# EAGLE board Main board2 (EAGLE 5.07)
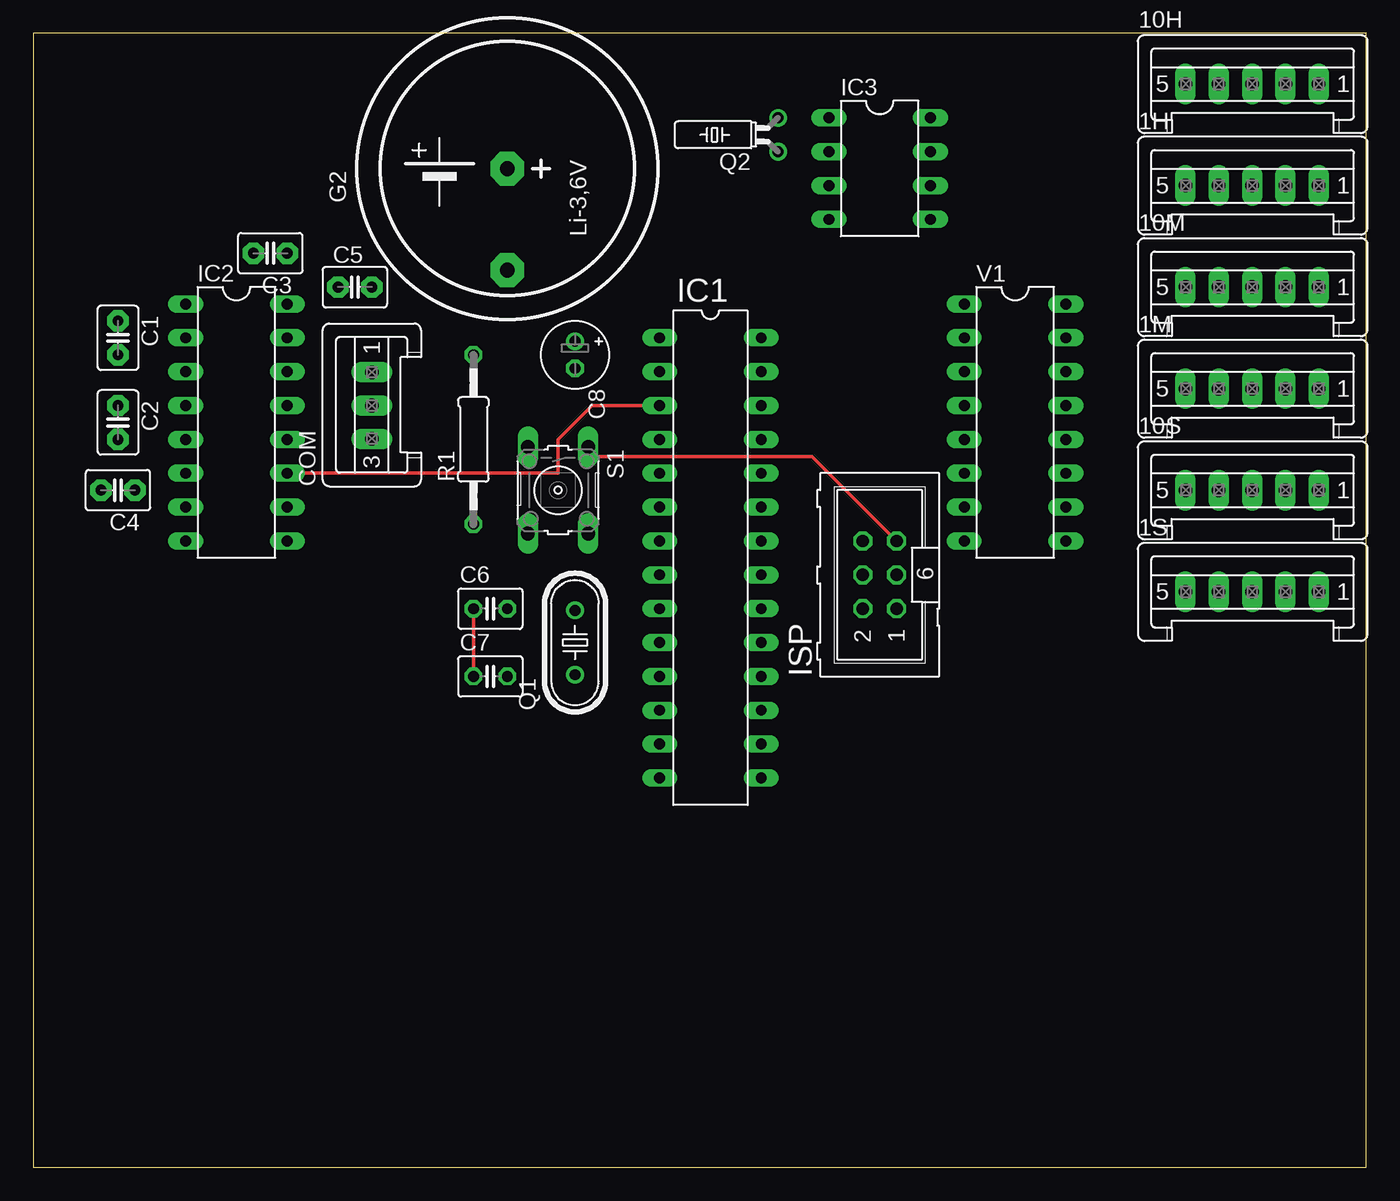
[diagram p0: board, top side]
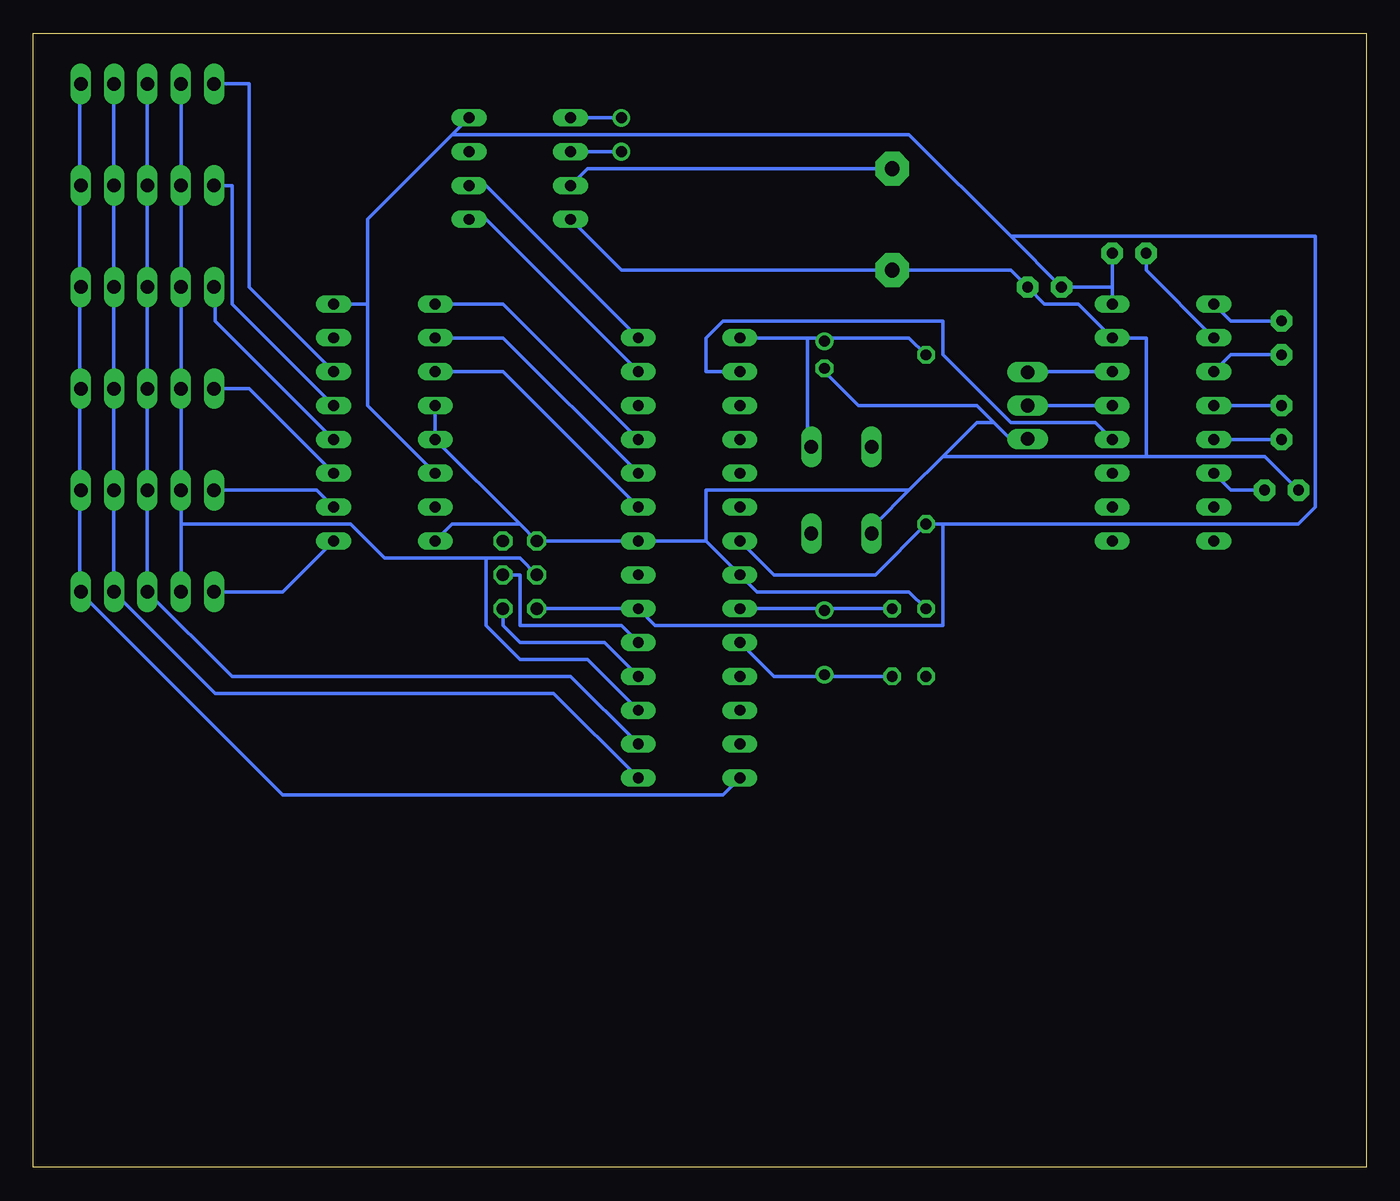
[diagram p1: board, bottom side, seen from below]

Size 100 x 85.08 mm. Coordinates in mm from the lower left corner, seen from the top.
Outline: 0,0 100,0 100,85.08 0,85.08 0,0
Copper layers (1*16): Top 0.035mm / dielectric 1.5mm / Bottom 0.035mm
Design rules "default": minimum track width 10mil, minimum drill 24mil, track to track 8mil, track to pad 8mil, pad to pad 8mil, via to via 8mil, smd to smd 8mil, copper to edge 40mil, drill to drill 8mil, minimum pad ring 10mil, minimum via ring 8mil, stop-mask expansion 4mil, vias tented up to drill 0mil, thermal gap 10mil

## Footprints (pad centres in the part's own frame; a part is rotated, then mirrored left to right if it is on the bottom)
S05P = drill 1.016 long: 1 5,0; 2 2.5,0; 3 0,0; 4 -2.5,0; 5 -5,0
C2.5-3 = drill 0.813 pad 1.6 octagon: 1 -1.27,0; 2 1.27,0
C025-030X050 = drill 0.813 octagon: 1 -1.27,0; 2 1.27,0
E2-5 = drill 0.813 pad 1.27 round: + -1.016,0 | drill 0.813 pad 1.27 octagon: - 1.016,0
S03P = drill 1.016 long: 1 2.5,0; 2 0,0; 3 -2.5,0
BEL/P = drill 1.118 pad 2.54 octagon: + 0,0; - -7.62,0
DIL28-3 = drill 0.813 long: 1 -16.51,-3.81; 2 -13.97,-3.81; 3 -11.43,-3.81; 4 -8.89,-3.81; 5 -6.35,-3.81; 6 -3.81,-3.81; 7 -1.27,-3.81; 8 1.27,-3.81; 9 3.81,-3.81; 10 6.35,-3.81; 11 8.89,-3.81; 12 11.43,-3.81; 13 13.97,-3.81; 14 16.51,-3.81; 15 16.51,3.81; 16 13.97,3.81; 17 11.43,3.81; 18 8.89,3.81; 19 6.35,3.81; 20 3.81,3.81; 21 1.27,3.81; 22 -1.27,3.81; 23 -3.81,3.81; 24 -6.35,3.81; 25 -8.89,3.81; 26 -11.43,3.81; 27 -13.97,3.81; 28 -16.51,3.81
DIL16 = drill 0.813 long: 1 -8.89,-3.81; 2 -6.35,-3.81; 3 -3.81,-3.81; 4 -1.27,-3.81; 5 1.27,-3.81; 6 3.81,-3.81; 7 6.35,-3.81; 8 8.89,-3.81; 9 8.89,3.81; 10 6.35,3.81; 11 3.81,3.81; 12 1.27,3.81; 13 -1.27,3.81; 14 -3.81,3.81; 15 -6.35,3.81; 16 -8.89,3.81
DIL8 = drill 0.813 long: 1 -8.89,-3.81; 2 -6.35,-3.81; 3 -3.81,-3.81; 4 -1.27,-3.81; 5 -1.27,3.81; 6 -3.81,3.81; 7 -6.35,3.81; 8 -8.89,3.81
ML6 = drill 0.914 octagon: 1 -2.54,-1.27; 2 -2.54,1.27; 3 0,-1.27; 4 0,1.27; 5 2.54,-1.27; 6 2.54,1.27
HC49U-V = drill 0.813 round: 1 -2.413,0; 2 2.413,0
TC26H = drill 0.813 round: 1 -1.27,0; 2 1.27,0
0207/12 = drill 0.813 octagon: 1 -6.35,0; 2 6.35,0
B3F-10XX = drill 1.016 long: 1 -3.251,2.261; 2 3.251,2.261; 3 -3.251,-2.261; 4 3.251,-2.261

## Placement (x,y rotation side)
1H  [S05P]  91.44,73.66 0 top
1M  [S05P]  91.44,58.42 0 top
1S  [S05P]  91.44,43.18 0 top
10H  [S05P]  91.44,81.28 0 top
10M  [S05P]  91.44,66.04 0 top
10S  [S05P]  91.44,50.8 0 top
C1  1 uF  [C2.5-3]  6.35,62.23 270 top
C2  1 uF  [C2.5-3]  6.35,55.88 270 top
C3  1 uF  [C2.5-3]  17.78,68.58 180 top
C4  1 uF  [C2.5-3]  6.35,50.8 180 top
C5  1 uF  [C2.5-3]  24.13,66.04 0 top
C6  20pF  [C025-030X050]  34.29,41.91 0 top
C7  20pF  [C025-030X050]  34.29,36.83 0 top
C8  0.1uF  [E2-5]  40.64,60.96 270 top
COM  1  [S03P]  25.4,57.15 90 top
G2  3V  [BEL/P]  35.56,74.93 90 top
IC1  MEGA8-P  [DIL28-3]  50.8,45.72 270 top
IC2  MAX232  [DIL16]  15.24,55.88 270 top
IC3  DS1307DIL8  [DIL8]  63.5,69.85 270 top
ISP  [ML6]  63.5,44.45 90 top
Q1  4MHz  [HC49U-V]  40.64,39.37 90 top
Q2  32.768kHz  [TC26H]  55.88,77.47 90 top
R1  100k  [0207/12]  33.02,54.61 90 top
S1  [B3F-10XX]  39.37,50.8 270 top
V1  74238N  [DIL16]  73.66,55.88 270 top

## Library data of the parts
1H 1M 1S 10H 10M 10S COM = con-amp-mt
C1-C5 = capacitor-wima
C6 C7 R1 = ~~rcl
C8 = rcl
G2 = battery
IC1 = atmel
IC2 = maxim
IC3 = ~~dallas
ISP = con-harting-ml
Q1 Q2 = crystal
S1 = switch-omron
V1 = 74ttl-din

## Nets
E/D1: 10H.5 V1.14
E/D2: 1H.5 V1.13
E/D3: 10M.5 V1.12
E/D4: 1M.5 V1.11
E/D5: 10S.5 V1.10
E/D6: 1S.5 V1.9
GND: C4.2 C5.2 C6.1 C7.1 C8.- COM.3 G2.- IC1.8 IC1.22 IC2.15 IC3.4 ISP.6 S1.4 V1.4 V1.5 V1.8
N$1: C1.1 IC2.1
N$2: C1.2 IC2.3
N$3: C2.2 IC2.5
N$4: C2.1 IC2.4
N$5: C3.2 IC2.2
N$6: C4.1 IC2.6
N$7: COM.2 IC2.13
N$8: COM.1 IC2.14
N$9: IC3.1 Q2.2
N$10: IC1.18 ISP.1
N$11: IC1.3 IC2.11
N$12: IC1.2 IC2.12
N$13: IC1.19 ISP.3
N$14: IC1.23 V1.3
N$15: C6.2 IC1.9 Q1.2
N$16: C7.2 IC1.10 Q1.1
N$17: IC3.2 Q2.1
N$18: C8.+ IC1.1 ISP.5 R1.2 S1.1
N$19: IC1.28 IC3.6
N$20: IC1.25 V1.1
N$21: G2.+ IC3.3
N$22: IC1.27 IC3.5
N$23: IC1.24 V1.2
PB0: 1H.1 1M.1 1S.1 10H.1 10M.1 10S.1 IC1.14
PB1: 1H.2 1M.2 1S.2 10H.2 10M.2 10S.2 IC1.15
PB2: 1H.3 1M.3 1S.3 10H.3 10M.3 10S.3 IC1.16
PB3: 1H.4 1M.4 1S.4 10H.4 10M.4 10S.4 IC1.17 ISP.4
VCC: C3.1 C5.1 IC1.7 IC1.20 IC2.16 IC3.8 ISP.2 R1.1 V1.6 V1.16

## Tracks (layer width: path | path; a pad name or v marks a point on that pad's centre or on a via)
E/D1
  Bottom 0.254: V1.14 83.82,66.04 83.82,81.28 10H.5
E/D2
  Bottom 0.254: V1.13 85.09,64.77 85.09,73.66 1H.5
E/D3
  Bottom 0.254: V1.12 86.36,63.5 86.36,66.04 10M.5
E/D4
  Bottom 0.254: V1.11 83.82,58.42 1M.5
E/D5
  Bottom 0.254: V1.10 78.74,50.8 10S.5
E/D6
  Bottom 0.254: V1.9 81.28,43.18 1S.5
GND
  Top 0.254: C6.1 C7.1
  Bottom 0.254: V1.4 V1.5 63.5,48.26 | V1.8 68.58,48.26 63.5,48.26 | 63.5,48.26 ISP.6 IC1.22 49.53,46.99 | 49.53,46.99 IC1.8 45.72,43.18 34.29,43.18 C6.1 | 27.94,55.88 26.67,54.61 25.4,54.61 COM.3 | 27.94,55.88 29.21,57.15 38.1,57.15 40.64,59.69 C8.- | 31.75,53.34 29.21,55.88 27.94,55.88 | 31.75,53.34 34.29,50.8 | 34.29,50.8 36.83,48.26 S1.4 | C4.2 7.62,53.34 16.51,53.34 | 16.51,53.34 31.75,53.34 | IC3.4 55.88,67.31 G2.- 26.67,67.31 C5.2 24.13,64.77 21.59,64.77 IC2.15 16.51,62.23 16.51,53.34 | 49.53,46.99 49.53,50.8 34.29,50.8
N$1
  Bottom 0.254: IC2.1 10.16,63.5 C1.1
N$2
  Bottom 0.254: IC2.3 10.16,60.96 C1.2
N$3
  Bottom 0.254: C2.2 IC2.5
N$4
  Bottom 0.254: C2.1 IC2.4
N$5
  Bottom 0.254: IC2.2 16.51,67.31 C3.2
N$6
  Bottom 0.254: IC2.6 10.16,50.8 C4.1
N$7
  Bottom 0.254: IC2.13 COM.2
N$8
  Bottom 0.254: IC2.14 25.4,59.69 COM.1
N$9
  Bottom 0.254: Q2.2 IC3.1
N$10
  Bottom 0.254: IC1.18 57.15,39.37 63.5,39.37 64.77,40.64 ISP.1
N$11
  Top 0.254: IC2.11 39.37,52.07 39.37,54.61 41.91,57.15 IC1.3
N$12
  Bottom 0.254: IC2.12 20.32,55.88 26.67,55.88 31.75,60.96 31.75,63.5 48.26,63.5 49.53,62.23 49.53,59.69 IC1.2
N$13
  Bottom 0.254: IC1.19 55.88,40.64 63.5,40.64 63.5,44.45 ISP.3
N$14
  Bottom 0.254: IC1.23 64.77,59.69 V1.3
N$15
  Bottom 0.254: C6.2 40.64,41.91 | 40.64,41.91 IC1.9 | 40.64,41.91 Q1.2
N$16
  Bottom 0.254: C7.2 40.64,36.83 | IC1.10 44.45,36.83 40.64,36.83 | 40.64,36.83 Q1.1
N$17
  Bottom 0.254: Q2.1 IC3.2
N$18
  Top 0.254: ISP.5 58.42,53.34 41.91,53.34 S1.1
  Bottom 0.254: R1.2 34.29,62.23 40.64,62.23 | 40.64,62.23 41.91,62.23 | 41.91,62.23 IC1.1 | 40.64,62.23 C8.+ | 41.91,62.23 41.91,54.61 S1.1
N$19
  Bottom 0.254: IC1.28 66.04,73.66 IC3.6
N$20
  Bottom 0.254: IC1.25 64.77,64.77 V1.1
N$21
  Bottom 0.254: IC3.3 58.42,74.93 G2.+
N$22
  Bottom 0.254: IC1.27 66.04,71.12 IC3.5
N$23
  Bottom 0.254: IC1.24 64.77,62.23 V1.2
PB0
  Bottom 0.254: 96.52,66.04 96.52,73.66 | 96.52,73.66 96.52,81.28 10H.1 | 96.52,73.66 1H.1 | 96.52,50.8 96.52,58.42 | IC1.14 48.26,27.94 81.28,27.94 96.52,43.18 | 96.52,43.18 96.52,50.8 | 96.52,50.8 10S.1 | 96.52,43.18 1S.1 | 96.52,58.42 96.52,66.04 | 96.52,66.04 10M.1 | 96.52,58.42 1M.1
PB1
  Bottom 0.254: 93.98,66.04 93.98,73.66 | 93.98,73.66 93.98,81.28 10H.2 | 93.98,73.66 1H.2 | 93.98,50.8 93.98,58.42 | IC1.15 60.96,35.56 86.36,35.56 93.98,43.18 | 93.98,43.18 93.98,50.8 | 93.98,50.8 10S.2 | 93.98,43.18 1S.2 | 93.98,58.42 93.98,66.04 | 93.98,66.04 10M.2 | 93.98,58.42 1M.2
PB2
  Bottom 0.254: 10H.3 1H.3 10M.3 1M.3 10S.3 1S.3 85.09,36.83 59.69,36.83 IC1.16
PB3
  Bottom 0.254: IC1.17 58.42,38.1 63.5,38.1 66.04,40.64 66.04,45.72 | 66.04,45.72 63.5,45.72 ISP.4 | 88.9,73.66 88.9,81.28 10H.4 | 88.9,48.26 88.9,50.8 | 88.9,48.26 88.9,43.18 1S.4 | 88.9,58.42 88.9,66.04 | 88.9,50.8 88.9,58.42 | 88.9,50.8 10S.4 | 88.9,58.42 1M.4 | 88.9,66.04 88.9,73.66 | 88.9,73.66 1H.4 | 88.9,66.04 10M.4 | 66.04,45.72 73.66,45.72 76.2,48.26 88.9,48.26
VCC
  Bottom 0.254: ISP.2 IC1.20 53.34,40.64 31.75,40.64 31.75,48.26 | IC1.7 44.45,44.45 36.83,44.45 R1.1 31.75,48.26 | 19.05,66.04 C3.1 | 19.05,66.04 IC2.16 | 19.05,66.04 C5.1 26.67,69.85 | V1.6 74.93,57.15 74.93,64.77 | 74.93,64.77 V1.16 | 68.58,77.47 74.93,71.12 74.93,64.77 | 68.58,77.47 IC3.8 | 26.67,69.85 34.29,77.47 68.58,77.47 | 31.75,48.26 5.08,48.26 3.81,49.53 3.81,69.85 26.67,69.85